# Altium PCB BenchExam.PcbDoc
Units mil, origin at the board's own origin, x right, y up, seen from the top; angles counter-clockwise.
Board outline 2010.03 x 1015.03 mil, 2 copper layers (Top Layer, Bottom Layer); 12 components, 6 nets, 90 pads, 13 vias.
Unrouted connection lines stored in the file: 24.
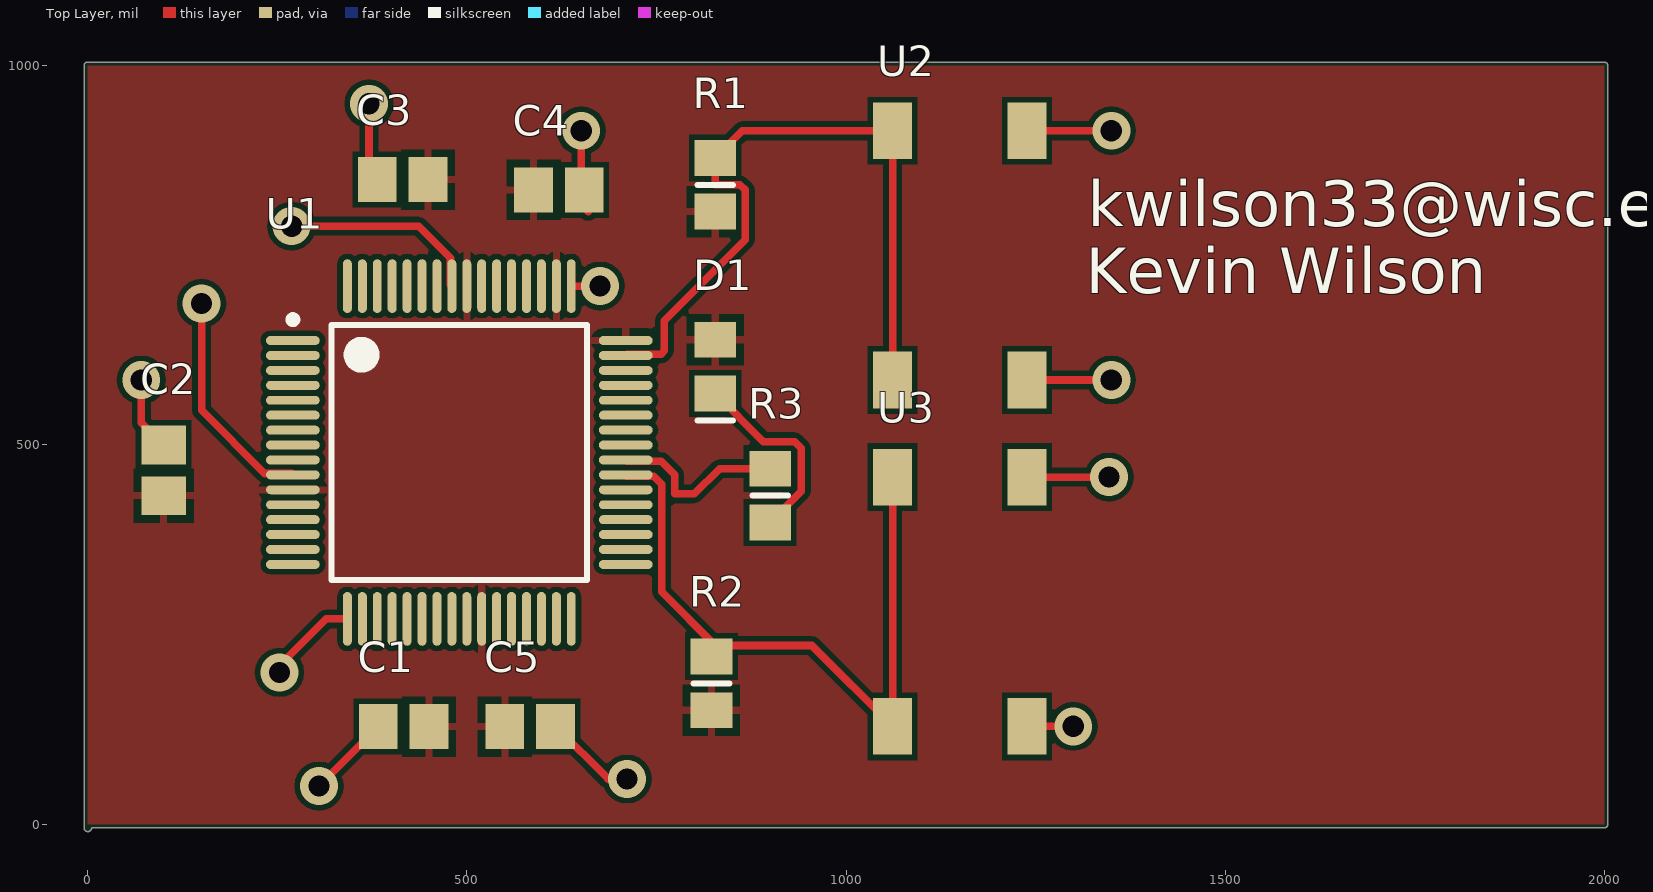
[diagram p0: Top Layer view]
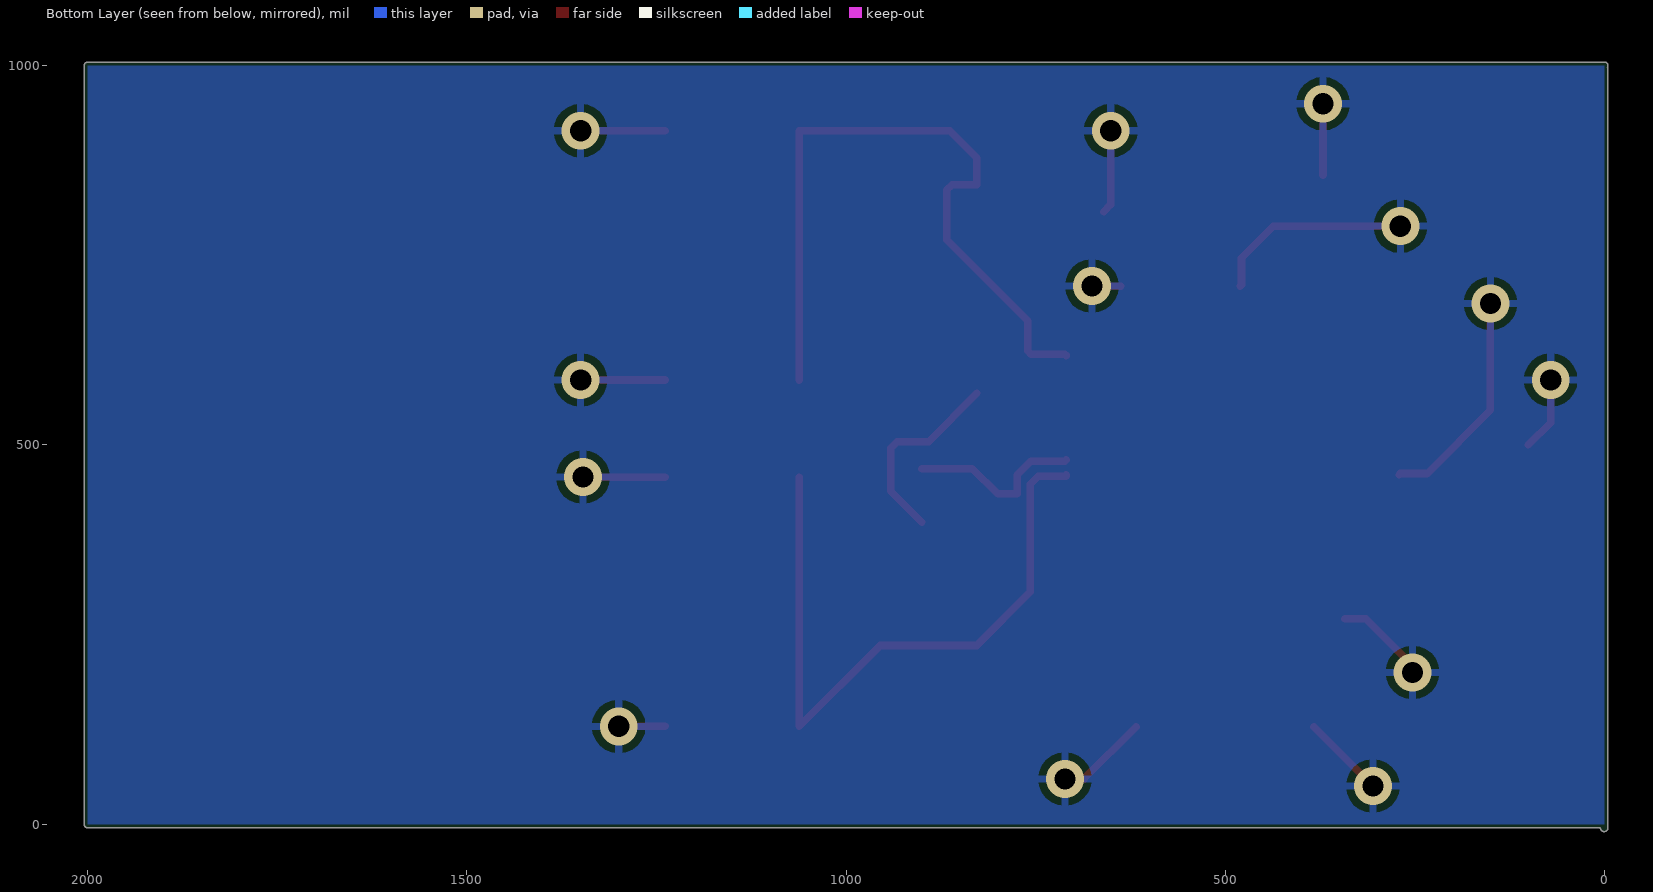
[diagram p1: Bottom Layer view, seen from below]

## Layer stack, top to bottom
Top Solder: solder mask 0.4, Solder Resist, Dk 3.5
Top Layer: signal copper 1.4
Dielectric 1: dielectric 12.6, FR-4, Dk 4.8
Bottom Layer: signal copper 1.4
Bottom Solder: solder mask 0.4, Solder Resist, Dk 3.5

## Board outline
-5.01,-5 -5.01,995 cw(c0,995) -4.35,997.5 cw(c0,1000) 0,1005.01 2000,1005.01 cw(c2000,1000) 2005.02,1000 2005.02,0 cw(c2000,0) 2000,-5.01 5.01,-5.01 cw(c0,-5)

## Design rules (kind name [scope] priority, off if disabled: settings)
Clearance [All] p1: gap=7 ignorepadtopadclearanceinfootprint=FALSE
HoleSize [All] p1: absolutevalues=TRUE maxlimit=250 minlimit=15 maxpercent=80.000 minpercent=20.000
MinimumAnnularRing [All] p1: minimumring=6
MinimumSolderMaskSliver [All] p1: minsoldermaskwidth=0
PolygonConnect [All] p1: connectstyle=Relief reliefconductorwidth=10 reliefentries=4 polygonreliefangle="90 Angle" airgapwidth=10
RoutingVias [All] p1: holewidth=28 width=50 viastyle="Through Hole" minholewidth=28 minwidth=50 maxholewidth=28 maxwidth=50
SilkToSolderMaskClearance [IsPad] p1: minsilkscreentomaskgap=7 clearancetoexposedcopper=TRUE
SolderMaskExpansion [All] p1: expansion=4
Width [All] p1: maxlimit=10 minlimit=10 preferedwidth=10
27 further rules are at their usual default settings.

## Components (designator, comment, footprint, x,y, rotation, side; value= is the part's Value field where it differs from the comment)
C1 "10uF" CAP_0805 416.54,128.54 r0 top
C2 "10uF" CAP_0805 100,466.54 r270 top
C3 "10uF" CAP_0805 415.2,850 r0 top
C4 "10uF" CAP_0805 621.35,836.27 r180 top
C5 "10uF" CAP_0805 583.46,128.54 r180 top
D1 "LED_BLUE_0805.1" LED_BLU_0805 827.56,603.3 r90 top
R1 "10K" RES_0805 827.56,843.11 r90 top
R2 "10K" RES_0805 822.56,185.43 r270 top
R3 "330" RES_0805 900,433.23 r90 top
U1 "CY8C4247AZI-M485" CYP-AZ64_N 490,490 r0 top
U2 "SWITCH_6mm_6mm_smd" SWITCH_6mm_6mm_smd 1150,750 r270 top
U3 "SWITCH_6mm_6mm_smd" SWITCH_6mm_6mm_smd 1150,293.15 r270 top

## Footprints (in the part's own frame and the unit in brackets; to place one, negate y for a bottom-side part, rotate by r counter-clockwise, add the part's x,y. Pads: shape width x height; smd on the part's side, far side on the other; paste and mask are expansions set on the pad)
CAP_0805 [mm]
  rect 1.3x1.5 smd: 1(-0.85,0) 2(0.85,0)
  body extent -1.1,-0.72 1.1,0.72, height 1.1
CYP-AZ64_N [mm] "QFP, 64-Leads, Body 10x10mm, Pitch 0.5mm, IPC Medium Density"
  oval 1.8x0.3 smd: 1(-5.575,3.75) 2(-5.575,3.25) 3(-5.575,2.75) 4(-5.575,2.25) 5(-5.575,1.75) 6(-5.575,1.25) 7(-5.575,0.75) 8(-5.575,0.25) 9(-5.575,-0.25) 10(-5.575,-0.75) 11(-5.575,-1.25) 12(-5.575,-1.75) 13(-5.575,-2.25) 14(-5.575,-2.75) 15(-5.575,-3.25) 16(-5.575,-3.75) 33(5.575,-3.75) 34(5.575,-3.25) 35(5.575,-2.75) 36(5.575,-2.25) 37(5.575,-1.75) 38(5.575,-1.25) 39(5.575,-0.75) 40(5.575,-0.25) 41(5.575,0.25) 42(5.575,0.75) 43(5.575,1.25) 44(5.575,1.75) 45(5.575,2.25) 46(5.575,2.75) 47(5.575,3.25) 48(5.575,3.75)
  oval 0.3x1.8 smd: 17(-3.75,-5.575) 18(-3.25,-5.575) 19(-2.75,-5.575) 20(-2.25,-5.575) 21(-1.75,-5.575) 22(-1.25,-5.575) 23(-0.75,-5.575) 24(-0.25,-5.575) 25(0.25,-5.575) 26(0.75,-5.575) 27(1.25,-5.575) 28(1.75,-5.575) 29(2.25,-5.575) 30(2.75,-5.575) 31(3.25,-5.575) 32(3.75,-5.575) 49(3.75,5.575) 50(3.25,5.575) 51(2.75,5.575) 52(2.25,5.575) 53(1.75,5.575) 54(1.25,5.575) 55(0.75,5.575) 56(0.25,5.575) 57(-0.25,5.575) 58(-0.75,5.575) 59(-1.25,5.575) 60(-1.75,5.575) 61(-2.25,5.575) 62(-2.75,5.575) 63(-3.25,5.575) 64(-3.75,5.575)
  silkscreen extent -5.7,-4.28 4.28,4.57, body extent -5,-5 5,5, height 1.6
LED_BLU_0805 [mm]
  rect 1.2x1.4 smd: 1(-0.9,0) 2(0.9,0)
  silkscreen extent -1.8,-0.6 -1.8,0.6, body extent -1.07,-0.7 1.07,0.7, height 0.8
RES_0805 [mm] "Chip Resistor, Body 2.0x1.3mm, IPC Medium Density"
  rect 1.2x1.4 smd: 1(-0.9,0) 2(0.9,0)
  silkscreen extent 0,-0.6 0,0.6, body extent -1.07,-0.7 1.07,0.7, height 0.65
SWITCH_6mm_6mm_smd [mm] "SWITCH TACTILE SPST-NO 0.05A 12V"
  rect 1.9x1.3 smd: 1(-4.175,2.25) 2(4.175,2.25) 3(-4.175,-2.25) 4(4.175,-2.25)
  body extent -4.96,-3.02 5.04,2.98, height 4.42

## Part data
C1 C2 C3 C4 C5: library part CAP_0805_U_010.00, "CAP CER 10UF 16V X7R 0805", Case/Package=0805, Case Code (Metric)=2012, Dielectric=X5R, Manufacturer=Samsung, Manufacturer Part Number=CL21A106KPCLQNC, Max Operating Temperature=85°C, Min Operating Temperature=-55°C, Package Quantity=1, Supplier Part Number=1276-2402-1-ND, Tolerance=10%, Voltage Rating=10V, Capacitance=10uF, Case Code (Imperial)=0805, ComponentLink1Description=https://datasheet.ciiva.com/25730/cl21a106kpclqnc-25730594.pdf, ComponentLink1URL=https://datasheet.ciiva.com/25730/cl21a106kpclqnc-25730594.pdf, ComponentLink3Description=https://datasheet.ciiva.com/26920/getdatasheetpartid-355170-26920201.pdf, ComponentLink3URL=https://datasheet.ciiva.com/26920/getdatasheetpartid-355170-26920201.pdf, Contact Plating=Tin, Depth=1.25mm, Height=0.85mm, Length=2mm, Mount="Surface Mount", Packaging="Tape and Reel", Radiation Hardening=No, Supplier=Digi-Key, Thickness=0.037inch, Width=0.049inch
D1: "LED 468NM BLUE CLEAR 0805 SMD", Case/Package=0805, Case Code (Metric)=2012, Color=Blue, Forward Current=20mA, Forward Voltage=3.8V, Lens Color=Colorless,Clear, Manufacturer="Vishay Lite-On", Manufacturer Part Number=LTST-C171TBKT, Max Operating Temperature=80°C, Min Operating Temperature=-20°C, Package Quantity=1, Power Dissipation=76mW, Reverse Voltage=5V, Supplier Part Number=160-1645-1-ND, Case Code (Imperial)=0805, ComponentLink1Description=https://datasheet.ciiva.com/2110/ltst-c171tbkt-2110304.pdf, ComponentLink1URL=https://datasheet.ciiva.com/2110/ltst-c171tbkt-2110304.pdf, ComponentLink2Description=https://datasheet.ciiva.com/2110/s-110-ltst-c171tbkt0630-2110305.pdf, ComponentLink2URL=https://datasheet.ciiva.com/2110/s-110-ltst-c171tbkt0630-2110305.pdf, ComponentLink3Description=https://datasheet.ciiva.com/11774/0900766b80dc029b-11774836.pdf, ComponentLink3URL=https://datasheet.ciiva.com/11774/0900766b80dc029b-11774836.pdf, ComponentLink4Description=https://datasheet.ciiva.com/12403/lite-on-ltst-c171tbkt-187246-12403800.pdf, ComponentLink4URL=https://datasheet.ciiva.com/12403/lite-on-ltst-c171tbkt-187246-12403800.pdf, ComponentLink5Description=https://datasheet.ciiva.com/15118/getdatasheetpartid-225754-15118121.pdf, ComponentLink5URL=https://datasheet.ciiva.com/15118/getdatasheetpartid-225754-15118121.pdf, ComponentLink6Description=https://datasheet.ciiva.com/16444/lite-onltst-c171tbkt-16444780.pdf, ComponentLink6URL=https://datasheet.ciiva.com/16444/lite-onltst-c171tbkt-16444780.pdf, Depth=1.25mm, Dominant Wavelength=475nm, Height=0.8mm, Illumination Color=Blue, Lead Free="Lead Free", Length=2mm, Lens Style=Diffused,Colorless,Rectangular,Clear, Lens Transparency=Clear, Luminous Intensity=180mcd, Mount="Surface Mount", Number of Elements=1, Number of LEDs=1, Number of Pins=2, Packaging="Tape and Reel", Radiation Hardening=No, Supplier=Digi-Key, Test Current=20mA, Viewing Angle=130°, Wavelength=468nm, Width=1.25mm
R1 R2: library part RES_0805_K_010.00, "RES SMD 10K OHM 1% 1/8W 0805", Case/Package=0805, Case Code (Metric)=2012, Manufacturer="Stackpole Electronics", Manufacturer Part Number=RMCF0805FT10K0, Max Operating Temperature=155°C, Max Power Dissipation=125mW, Min Operating Temperature=-55°C, Resistance=10kR, Supplier Part Number=RMCF0805FT10K0CT-ND, Temperature Coefficient=100ppm/°C, Tolerance=1%, Case Code (Imperial)=0805, ComponentLink1Description=https://datasheet.ciiva.com/11808/0900766b80f80784-11808080.pdf, ComponentLink1URL=https://datasheet.ciiva.com/11808/0900766b80f80784-11808080.pdf, ComponentLink2Description=https://datasheet.ciiva.com/16514/aoa0000ce2-16514021.pdf, ComponentLink2URL=https://datasheet.ciiva.com/16514/aoa0000ce2-16514021.pdf, ComponentLink3Description=https://datasheet.ciiva.com/27055/1988971-27055733.pdf, ComponentLink3URL=https://datasheet.ciiva.com/27055/1988971-27055733.pdf, ComponentLink4Description=https://datasheet.ciiva.com/16759/70260748-16759350.pdf, ComponentLink4URL=https://datasheet.ciiva.com/16759/70260748-16759350.pdf, ComponentLink5Description=https://datasheet.ciiva.com/16725/70260748-16725031.pdf, ComponentLink5URL=https://datasheet.ciiva.com/16725/70260748-16725031.pdf, ComponentLink6Description=https://datasheet.ciiva.com/7830/426256-7830745.pdf, ComponentLink6URL=https://datasheet.ciiva.com/7830/426256-7830745.pdf, ComponentLink7Description=https://datasheet.ciiva.com/46372/1678782-46372714.pdf, ComponentLink7URL=https://datasheet.ciiva.com/46372/1678782-46372714.pdf, ComponentLink8Description=https://datasheet.ciiva.com/46372/1678782-46372715.pdf, ComponentLink8URL=https://datasheet.ciiva.com/46372/1678782-46372715.pdf, ComponentLink9Description=https://datasheet.ciiva.com/17212/aoa0000ce2-17212108.pdf, ComponentLink9URL=https://datasheet.ciiva.com/17212/aoa0000ce2-17212108.pdf, ComponentLink10Description=https://datasheet.ciiva.com/30140/aoa0000ce2-30140236.pdf, ComponentLink10URL=https://datasheet.ciiva.com/30140/aoa0000ce2-30140236.pdf, ComponentLink11Description=https://datasheet.ciiva.com/16740/aoa0000ce2-16740669.pdf, ComponentLink11URL=https://datasheet.ciiva.com/16740/aoa0000ce2-16740669.pdf, ComponentLink12Description=https://datasheet.ciiva.com/24070/aoa0000ce2-24070702.pdf, ComponentLink12URL=https://datasheet.ciiva.com/24070/aoa0000ce2-24070702.pdf, Composition="Thick Film", Contact Plating=Tin,Matte, Depth=1.25mm, Features="Automotive AEC-Q200", Height=0.026inch, Lead Free="Lead Free", Length=2mm, Military Standard=Not, Mount="Surface Mount", Number of Terminations=2, Packaging="Tape and Reel", Power Rating=125mW, Radiation Hardening=No, Supplier=Digi-Key, Width=0.049inch
R3: library part RES_0805_R_330.00, "RES SMD 330 OHM 1% 1/8W 0805", Case/Package=0805, Case Code (Metric)=2012, Manufacturer="Stackpole Electronics", Manufacturer Part Number=RMCF0805FT330R, Max Operating Temperature=155°C, Max Power Dissipation=125mW, Min Operating Temperature=-55°C, Resistance=330R, Supplier Part Number=RMCF0805FT330RCT-ND, Temperature Coefficient=100ppm/°C, Tolerance=1%, Case Code (Imperial)=0805, ComponentLink1Description=https://datasheet.ciiva.com/11821/0900766b80f80784-11821635.pdf, ComponentLink1URL=https://datasheet.ciiva.com/11821/0900766b80f80784-11821635.pdf, ComponentLink2Description=https://datasheet.ciiva.com/30131/aoa0000ce2-30131349.pdf, ComponentLink2URL=https://datasheet.ciiva.com/30131/aoa0000ce2-30131349.pdf, ComponentLink3Description=https://datasheet.ciiva.com/24025/aoa0000ce2-24025991.pdf, ComponentLink3URL=https://datasheet.ciiva.com/24025/aoa0000ce2-24025991.pdf, ComponentLink4Description=https://datasheet.ciiva.com/17206/aoa0000ce2-17206152.pdf, ComponentLink4URL=https://datasheet.ciiva.com/17206/aoa0000ce2-17206152.pdf, ComponentLink5Description=https://datasheet.ciiva.com/46436/1678782-46436633.pdf, ComponentLink5URL=https://datasheet.ciiva.com/46436/1678782-46436633.pdf, ComponentLink6Description=https://datasheet.ciiva.com/46436/1678782-46436634.pdf, ComponentLink6URL=https://datasheet.ciiva.com/46436/1678782-46436634.pdf, ComponentLink7Description=https://datasheet.ciiva.com/16760/70260748-16760668.pdf, ComponentLink7URL=https://datasheet.ciiva.com/16760/70260748-16760668.pdf, ComponentLink8Description=https://datasheet.ciiva.com/16780/70260748-16780764.pdf, ComponentLink8URL=https://datasheet.ciiva.com/16780/70260748-16780764.pdf, ComponentLink9Description=https://datasheet.ciiva.com/22684/1678782-22684798.pdf, ComponentLink9URL=https://datasheet.ciiva.com/22684/1678782-22684798.pdf, ComponentLink10Description=https://datasheet.ciiva.com/28590/1678782-28590783.pdf, ComponentLink10URL=https://datasheet.ciiva.com/28590/1678782-28590783.pdf, Composition="Thick Film", Contact Plating=Tin,Matte, Depth=1.25mm, Features="Automotive AEC-Q200", Height=0.026inch, Lead Free="Lead Free", Length=0.079inch, Military Standard=Not, Mount="Surface Mount", Number of Terminations=2, Packaging="Tape and Reel", Radiation Hardening=No, Supplier=Digi-Key, Width=0.049inch
U1: "Programmable System-on-Chip (PSoC®), 128 KB Flash, 51 GPIOs, 1.71 to 5.5 V, 64-Pin TQFP (AZ64), Tray", Case/Package=TQFP, Frequency=48MHz, Manufacturer=Cypress, Max. Operating Frequency (MHz)=48, Max. Operating Temp. (degreesC)=85, Max. Operating Voltage (V)=5.5, Max Operating Temperature=85°C, Max Supply Voltage=5.5V, Min. Operating Temp. (degreesC)=-40, Min. Operating Voltage (V)=1.71, Min Operating Temperature=-40°C, Min Supply Voltage=1.71V, Supplier Part Number=428-3577-ND, ComponentLink1Description="Manufacturer URL", ComponentLink1URL=http://www.cypress.com/, ComponentLink2Description=Datasheet, ComponentLink2URL=http://www.cypress.com/file/139956/download, ComponentLink3Description="Package Specification", ComponentLink3URL=http://www.cypress.com/file/129016/download, Contact Plating=Gold, Core Architecture=ARM, CPU Core="ARM Cortex-M0", DatasheetVersion="Rev. *D", Flash (KB)=128, Interface=I2C,SPI,CAN,IrDA,SSP,UART,USART,LIN, Lead Free="Lead Free", Manufacturer Part Number=CY8C4247AZI-M485, Max Frequency=48MHz, Memory Size=128KB, Memory Type=FLASH, Mount="Surface Mount", Mounting Technology="Surface Mount", No. of GPIOs=51, No. of Op Amps=4, Number of I/Os=51, Number of Pins=64, Number of Programmable I/O=51, Number of Timers/Counters=8, Oscillator Type=Internal, PackageDescription="64-Pin Thin Plastic Quad Flatpack, Body 10 x 10 mm, Pitch 0.5 mm", PackageReference=AZ64, PackageVersion="Rev. *B, 01/2010", Packaging=Tray, Packing=Tray, PartNumber=CY8C4247AZI-M485, Peripherals="Brown-out Detect/Reset,POR,PWM,WDT,LVD,LCD", RAM Size=16KB, REACH SVHC="No SVHC", RoHS=Pb-Free, Section=002, SRAM (KB)=16, Supplier=Digi-Key, Watchdog Timer=Yes
U2 U3: "SWITCH TACTILE SPST-NO 0.05A 12V", Manufacturer="Carl Kammerling", Manufacturer Part Number=PTS645SH50SMTR92LFS, Supplier Part Number=CKN9085CT-ND, Supplier=Digi-Key

## Via types
v1: diameter 50, hole 28, Top Layer to Bottom Layer, 13 vias

## Nets (pads, with @x,y where several pads share a name; then routed paths per layer and width w, separated by ;. In a path a pad name is that pad's centre, name@x,y a point inside that pad or via, vN(x,y) a via of type N, cw(c..) or ccw(c..) an arc to the next point about the centre after c; other vN are vias at no path point)
3.3V: C1.2 C2.2 C3.2 C4.2 C5.2 D1.2 R1.1 R2.2 U1.11 U1.26 U1.48 U1.50 U1.56
GND: C1.1 C2.1 C3.1 C4.1 C5.1 U1.10 U1.17 U1.49 U1.57 U2.1 U2.2 U3.1 U3.2 | length 1652.4
  Top Layer w10: v1(70.5,585.63) 70.5,529.5 C2.1 ; v1(150,686.67) 150,545.82 233.57,462.25 268.73,462.25 U1.10 ; v1(252.69,200) 252.69,208.56 314.64,270.51 U1.17 ; v1(268.82,788.51) 436.3,788.51 478.38,746.43 478.38,711.27 U1.57 ; v1(305.07,50) 305.07,50.55 C1.1 ; C3.1@370.84,855.74 v1(370.84,950) ; C5.1 686.1,59.38 v1(711.27,59.38) ; U1.49 v1(675.71,709.49) ; v1(650.8,914.37) 650.8,817.12 C4.1@660.24,807.68 ; U3.2 v1(1299.76,128.78) ; U3.1 v1(1347.05,457.52) ; U2.2 v1(1350,585.63) ; U2.1 v1(1350,914.37)
"P0 1": R3.2 U1.40 | length 237.6
  Top Layer w10: U1.40 711.27,478.38 756.22,478.38 773.92,460.67 773.92,435.43 800,435.43 833.23,468.66 R3.2
P0.0: R2.1 U1.39 U3.3 U3.4 | length 902.4
  Top Layer w10: U1.39 709.49,458.69 746.43,458.69 756.92,448.2 756.92,306.07 827.56,235.43 954.76,235.43 U3.4 U3.3
"P01 R": D1.1 R3.1 | length 258.5
  Top Layer w10: D1.1 891.15,504.28 932.53,504.28 941.2,495.61 941.2,439 R3.1
RST_N: R1.2 U1.47 U2.3 U2.4 | length 965.1
  Top Layer w10: U1.47 711.27,619.73 756.22,619.73 760.44,623.96 760.44,664.03 867.12,770.7 867.12,836.27 860.09,843.3 827.56,843.3 R1.2 863.39,914.37 U2.3 U2.4
pads on no net: U1.1 U1.2 U1.3 U1.4 U1.5 U1.6 U1.7 U1.8 U1.9 U1.12 U1.13 U1.14 U1.15 U1.16 U1.18 U1.19 U1.20 U1.21 U1.22 U1.23 U1.24 U1.25 U1.27 U1.28 U1.29 U1.30 U1.31 U1.32 U1.33 U1.34 U1.35 U1.36 U1.37 U1.38 U1.41 U1.42 U1.43 U1.44 U1.45 U1.46 U1.51 U1.52 U1.53 U1.54 U1.55 U1.58 U1.59 U1.60 U1.61 U1.62 U1.63 U1.64

## Polygon pours and split planes (outlines as drawn)
3.3V on Top Layer "Top Layer-3.3V" (solid, remove dead copper, pour order 0): 0,1000 0,0 2000,0 2000,1000
GND on Bottom Layer "Bottom Layer-GND 1" (solid, remove dead copper, pour order 10): 0,1000 0,0 2000,0 2000,1000

## Silkscreen, mask and mechanical layers (free items; w line width, h text height)
Top Overlay:
  text "kwilson33@wisc.edu" at 1319.1,788.51 h60
  text "Kevin Wilson" at 1315.9,700 h60
Mechanical 1:
  text "Bench Exam" at 1950,2295 h200
  text "Instructions" at 2030,2055 h200
  text "1. A GND Polygon will be placed on the bottom layer. This polygon should cover the entire board. /  / 2. A 3.3V Polygon will be placed on the top layer. This polygon should cover the entire board. /  / 3. All components MUST be on the top layer. /  / 4. Bypass caps should be close to power pins. /  / 5. All non-polygon tracks should be 10mils /  / 6. All nets need to be routed. (no auto-router) /  / 7. Add a String on the top overlay with your name and email address. /  / 8. Make sure there are 0 DRC errors." at 2100,50 h100
Mechanical 2:
  lines w10: 0,-5 0,995 ; 0,0 2000,0 2000,1000 0,1000
Mechanical 3:
  text "S19 Section-003" at 1905,5 h2